# Altium PCB PIEZO_ver2_pcb3.PcbDoc
Units mil, origin at the board's own origin, x right, y up, seen from the top; angles counter-clockwise.
Board outline 995.03 x 920.03 mil, 2 copper layers (Top Layer, Bottom Layer); 7 components, 10 nets, 28 pads, 0 vias.
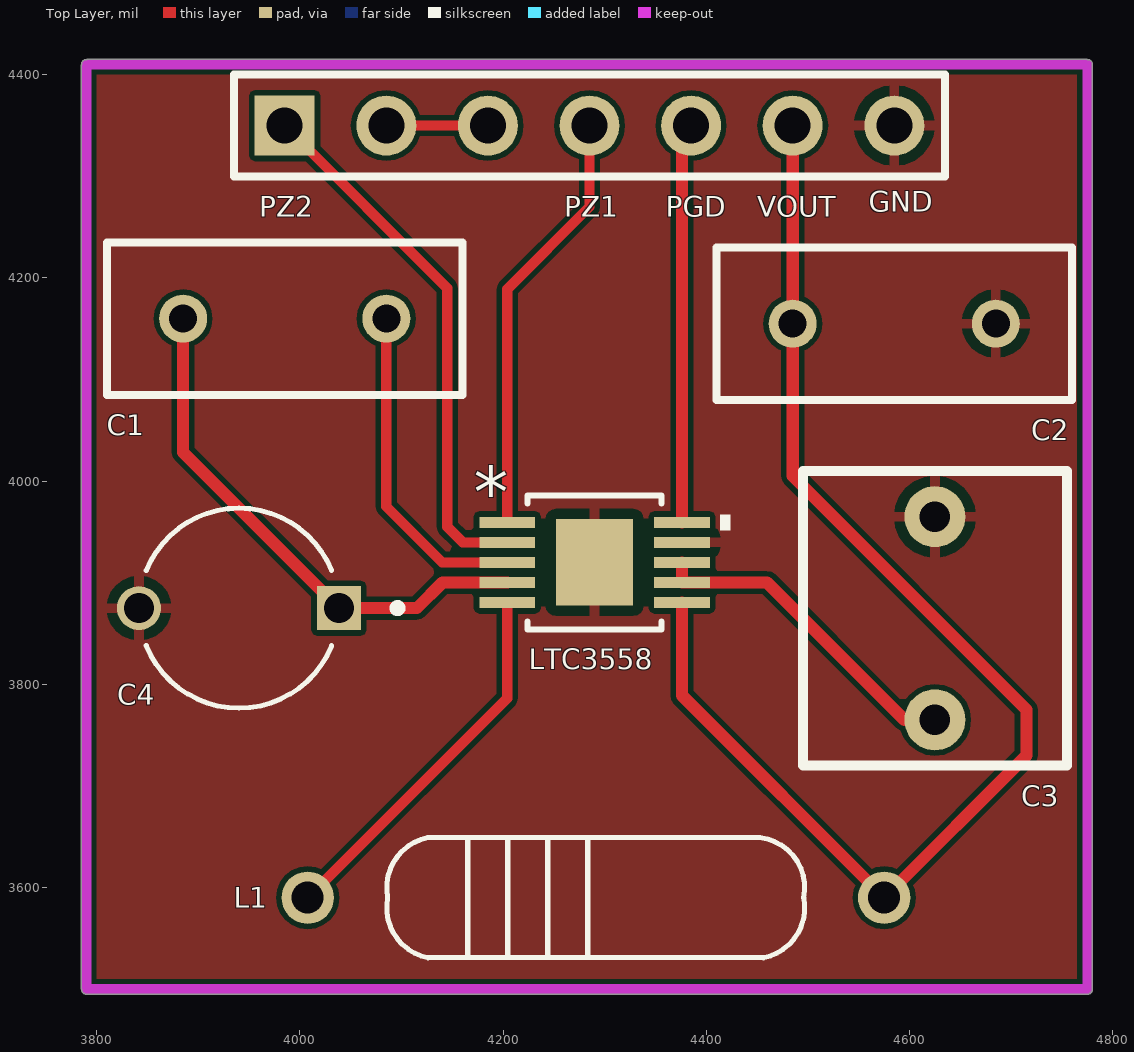
[diagram p0: Top Layer view]
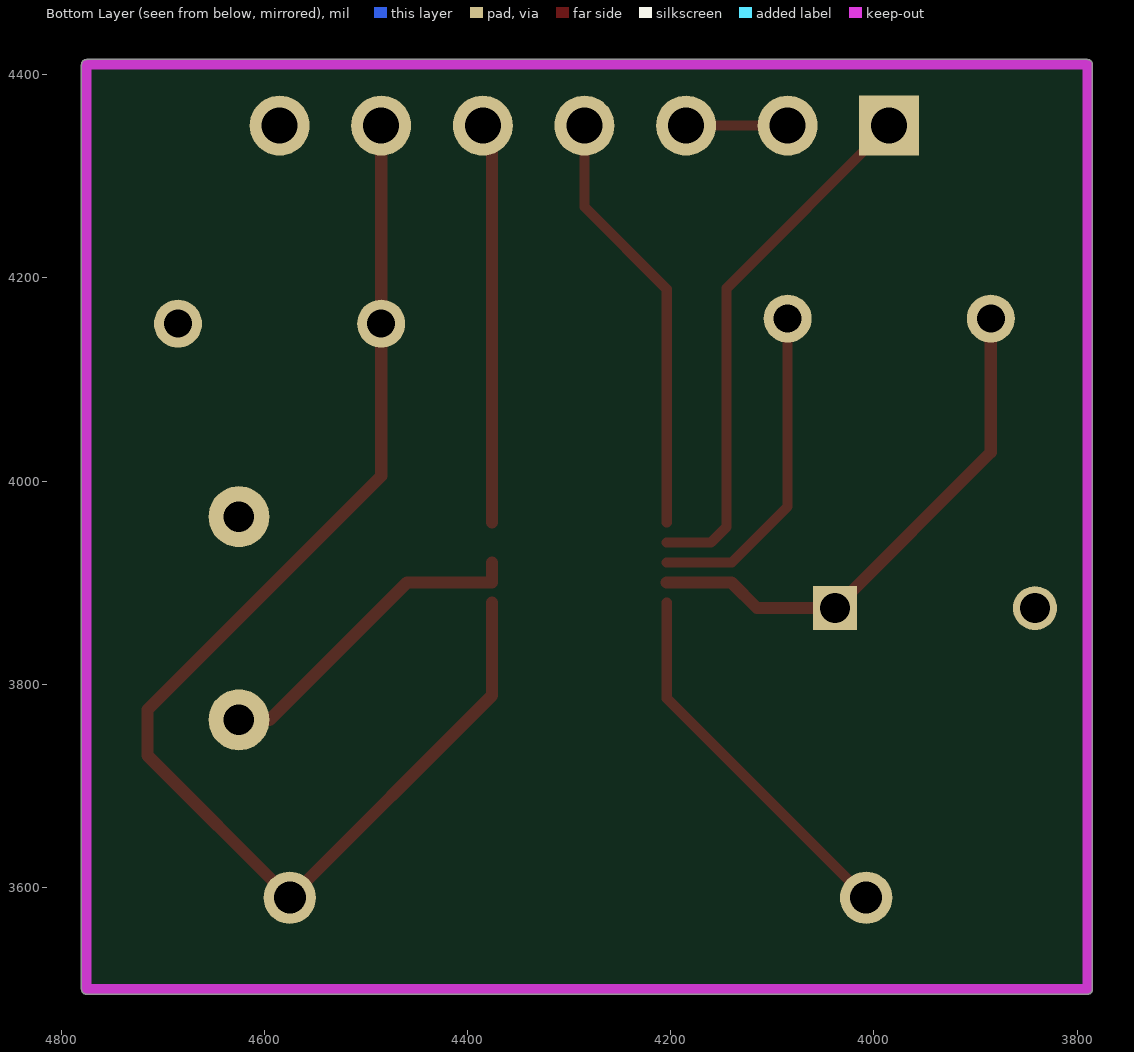
[diagram p1: Bottom Layer view, seen from below]

## Layer stack, top to bottom
Top Solder: solder mask 0.4, Solder Resist, Dk 3.5
Top Layer: signal copper 1.4
Dielectric 1: dielectric 12.6, FR-4, Dk 4.8
Bottom Layer: signal copper 1.4
Bottom Solder: solder mask 0.4, Solder Resist, Dk 3.5

## Board outline
3784.99,3500 ccw(c3790,3500) 3790,3494.99 4775,3494.99 ccw(c4775,3500) 4780.02,3500 4780.02,4410 ccw(c4775,4410) 4775,4415.02 3790,4415.02 ccw(c3790,4410) 3784.99,4410

## Design rules (kind name [scope] priority, off if disabled: settings)
Clearance [All] p1: gap=5 ignorepadtopadclearanceinfootprint=FALSE
PolygonConnect [All] p1: connectstyle=Relief reliefconductorwidth=10 reliefentries=4 polygonreliefangle="90 Angle" airgapwidth=10
RoutingVias [All] p1: holewidth=28 width=50 viastyle="Through Hole" minholewidth=28 minwidth=50 maxholewidth=28 maxwidth=50
SolderMaskExpansion [All] p1: expansion=4
Width signal [InNetClass('signals')] p1: maxlimit=10 minlimit=10 preferedwidth=10
Width power [InNetClass('power')] p2: maxlimit=15 minlimit=10 preferedwidth=12
30 further rules are at their usual default settings.

## Classes and differential pairs
net class signals: CAP NetP1_2 PZ1 PZ2 SW
net class power: GND PGOOD VIN VIN2 VOUT

## Components (designator, comment, footprint, x,y, rotation, side; value= is the part's Value field where it differs from the comment)
C1 "Cap" RAD-0.2 3985,4160 r0 top value=1uF
C2 "Cap" RAD-0.2 4585,4155 r180 top value=47uF
C3 "Cap" PCBComponent_1 4625,3765 r90 top value=4.7uF
C4 "Cap" CAPPRD500W50D500H1100 3940,3875 r180 top value=10uF
L1 "77F470J-TR-RC" 77F 4007.68,3590 r0 top
LTC3558 "LTC3588IMSE-1PBF" MSOP-10_MSE 4290,3920 r0 top
P1 "7" HDR1X7 3985,4350 r0 top

## Footprints (in the part's own frame and the unit in brackets; to place one, negate y for a bottom-side part, rotate by r counter-clockwise, add the part's x,y. Pads: shape width x height; smd on the part's side, far side on the other; paste and mask are expansions set on the pad)
77F [mm]
  round 1.308 hole 0.8: P$1(0,0) P$2(14.41,0)
  silkscreen extent 1.98,-1.5 12.42,1.5, body extent -0.54,-1.99 14.99,1.99, height 3.99
CAPPRD500W50D500H1100 [mm]
  round 1.1 hole 0.75: N(2.5,0)
  rect 1.1x1.1 hole 0.75: P(-2.5,0)
  silkscreen extent -4.06,-2.5 2.32,2.5, body extent -2.75,-2.5 2.75,2.5, height 11
HDR1X7 [mm] "Connector; Header; 7 Position"
  rect 1.5x1.5 hole 0.9: 1(0,0)
  round 1.5 hole 0.9: 2(2.54,0) 3(5.08,0) 4(7.62,0) 5(10.16,0) 6(12.7,0) 7(15.24,0)
  silkscreen extent -1.27,-1.27 16.51,1.27
MSOP-10_MSE [mil]
  rect 55x11 smd: 1(-86,39.4) 2(-86,19.7) 3(-86,0) 4(-86,-19.7) 5(-86,-39.4) 6(86,-39.4) 7(86,-19.7) 8(86,0) 9(86,19.7) 10(86,39.4)
  rect 76x85 smd paste-78.74: 11(0,0)
  silkscreen extent -66,-66 134,66
PCBComponent_1 [mil]
  round 60 hole 30: 1(0,0) 2(200,0)
  silkscreen extent -45,-130 245,130, body extent -42,-128 242,128, height 315
RAD-0.2 [mm] "Radial Cap, Thru-Hole; 2 Leads; 0.2 in Pin Spacing"
  round 1.2 hole 0.7: 1(-2.54,0) 2(2.54,0)
  silkscreen extent -4.44,-1.91 4.44,1.91

## Part data
C1 C2 C3 C4: "Capacitor", LatestRevisionDate=17-Jul-2002, LatestRevisionNote="Re-released for DXP Platform.", PackageDescription="Radial Cap, Thru-Hole; 2 Leads; 0.3 in Pin Spacing", PackageReference=RAD-0.3, Published=8-Jun-2000, Publisher="Altium Limited"
L1: "47 µH Unshielded Drum Core, Wirewound Inductor 340 mA 1.3Ohm Max Axial", Package=Package, Check_prices=https://www.snapeda.com/parts/77F470J-TR-RC/Bourns/view-part/?ref=eda, MF=Bourns, MP=77F470J-TR-RC, SnapEDA_Link=https://www.snapeda.com/parts/77F470J-TR-RC/Bourns/view-part/?ref=snap
LTC3558: Package=None, Availability=Unavailable, MP=LTC3588IMSE-1PBF, Price=None
P1: library part "Header 7", "Header, 7-Pin", LatestRevisionDate=17-Jul-2002, LatestRevisionNote="Re-released for DXP Platform.", Publisher="Altium Limited"

## Nets (pads, with @x,y where several pads share a name; then routed paths per layer and width w, separated by ;. In a path a pad name is that pad's centre, name@x,y a point inside that pad or via, vN(x,y) a via of type N, cw(c..) or ccw(c..) an arc to the next point about the centre after c; other vN are vias at no path point)
CAP: C1.2 LTC3558.3 | length 326.8
  Top Layer w10: C1.2 4085,3975 4140,3920 LTC3558.3
GND: C2.1 C3.2 C4.N LTC3558.9 LTC3558.11 P1.7
NetP1_2: P1.2 P1.3 | length 100
  Top Layer w10: P1.2 P1.3
PGOOD: LTC3558.10 P1.5 | length 394.3
  Top Layer w12: LTC3558.10 4376,4341 P1.5
PZ1: LTC3558.1 P1.4 | length 424.2
  Top Layer w10: LTC3558.1 4204,4189 4285,4270 P1.4
PZ2: LTC3558.2 P1.1 | length 526.6
  Top Layer w10: P1.1 4145,4190 4145,3955 4160.3,3939.7 LTC3558.2
SW: L1.P$1 LTC3558.5 | length 371.9
  Top Layer w10: L1.P$1 4204,3786.32 LTC3558.5
VIN: C1.1 C4.P LTC3558.4 | length 524.6
  Top Layer w12: C1.1 3885,4028.43 C4.P 4115,3875 4140.3,3900.3 LTC3558.4
VIN2: C3.1 LTC3558.7 LTC3558.8 | length 324.7
  Top Layer w12: LTC3558.8 LTC3558.7 4459.7,3900.3 4595,3765 C3.1
VOUT: C2.2 L1.P$2 LTC3558.6 P1.6 | length 1286.3
  Top Layer w12: LTC3558.6 4376,3789 L1.P$2 4715,3730 4715,3775 4485,4005 C2.2 P1.6

## Polygon pours and split planes (outlines as drawn)
GND on Top Layer "GND" (solid, pour order 0): 3790,4410 4775,4410 4775,3500 3790,3500

## Keep-outs
Keep-Out Layer:
  lines w10: 3790,3500 4775,3500 4775,4410 3790,4410 3790,3500

## Silkscreen, mask and mechanical layers (free items; w line width, h text height)
Top Overlay:
  text "GND" at 4560,4265 h20
  text "PZ2" at 3960,4260 h20
  text "PZ1" at 4260,4260 h20
  text "PGD" at 4360,4260 h20
  text "VOUT" at 4450,4260 h20

## Text inside footprints (layer, text, board x,y; h text height)
LTC3558: Top Overlay "*" at 4171,3965 h50; Mechanical 13 "*" at 4221,3928 h50